# EAGLE board proto2fix (EAGLE 6.6.0), part 1 of 3
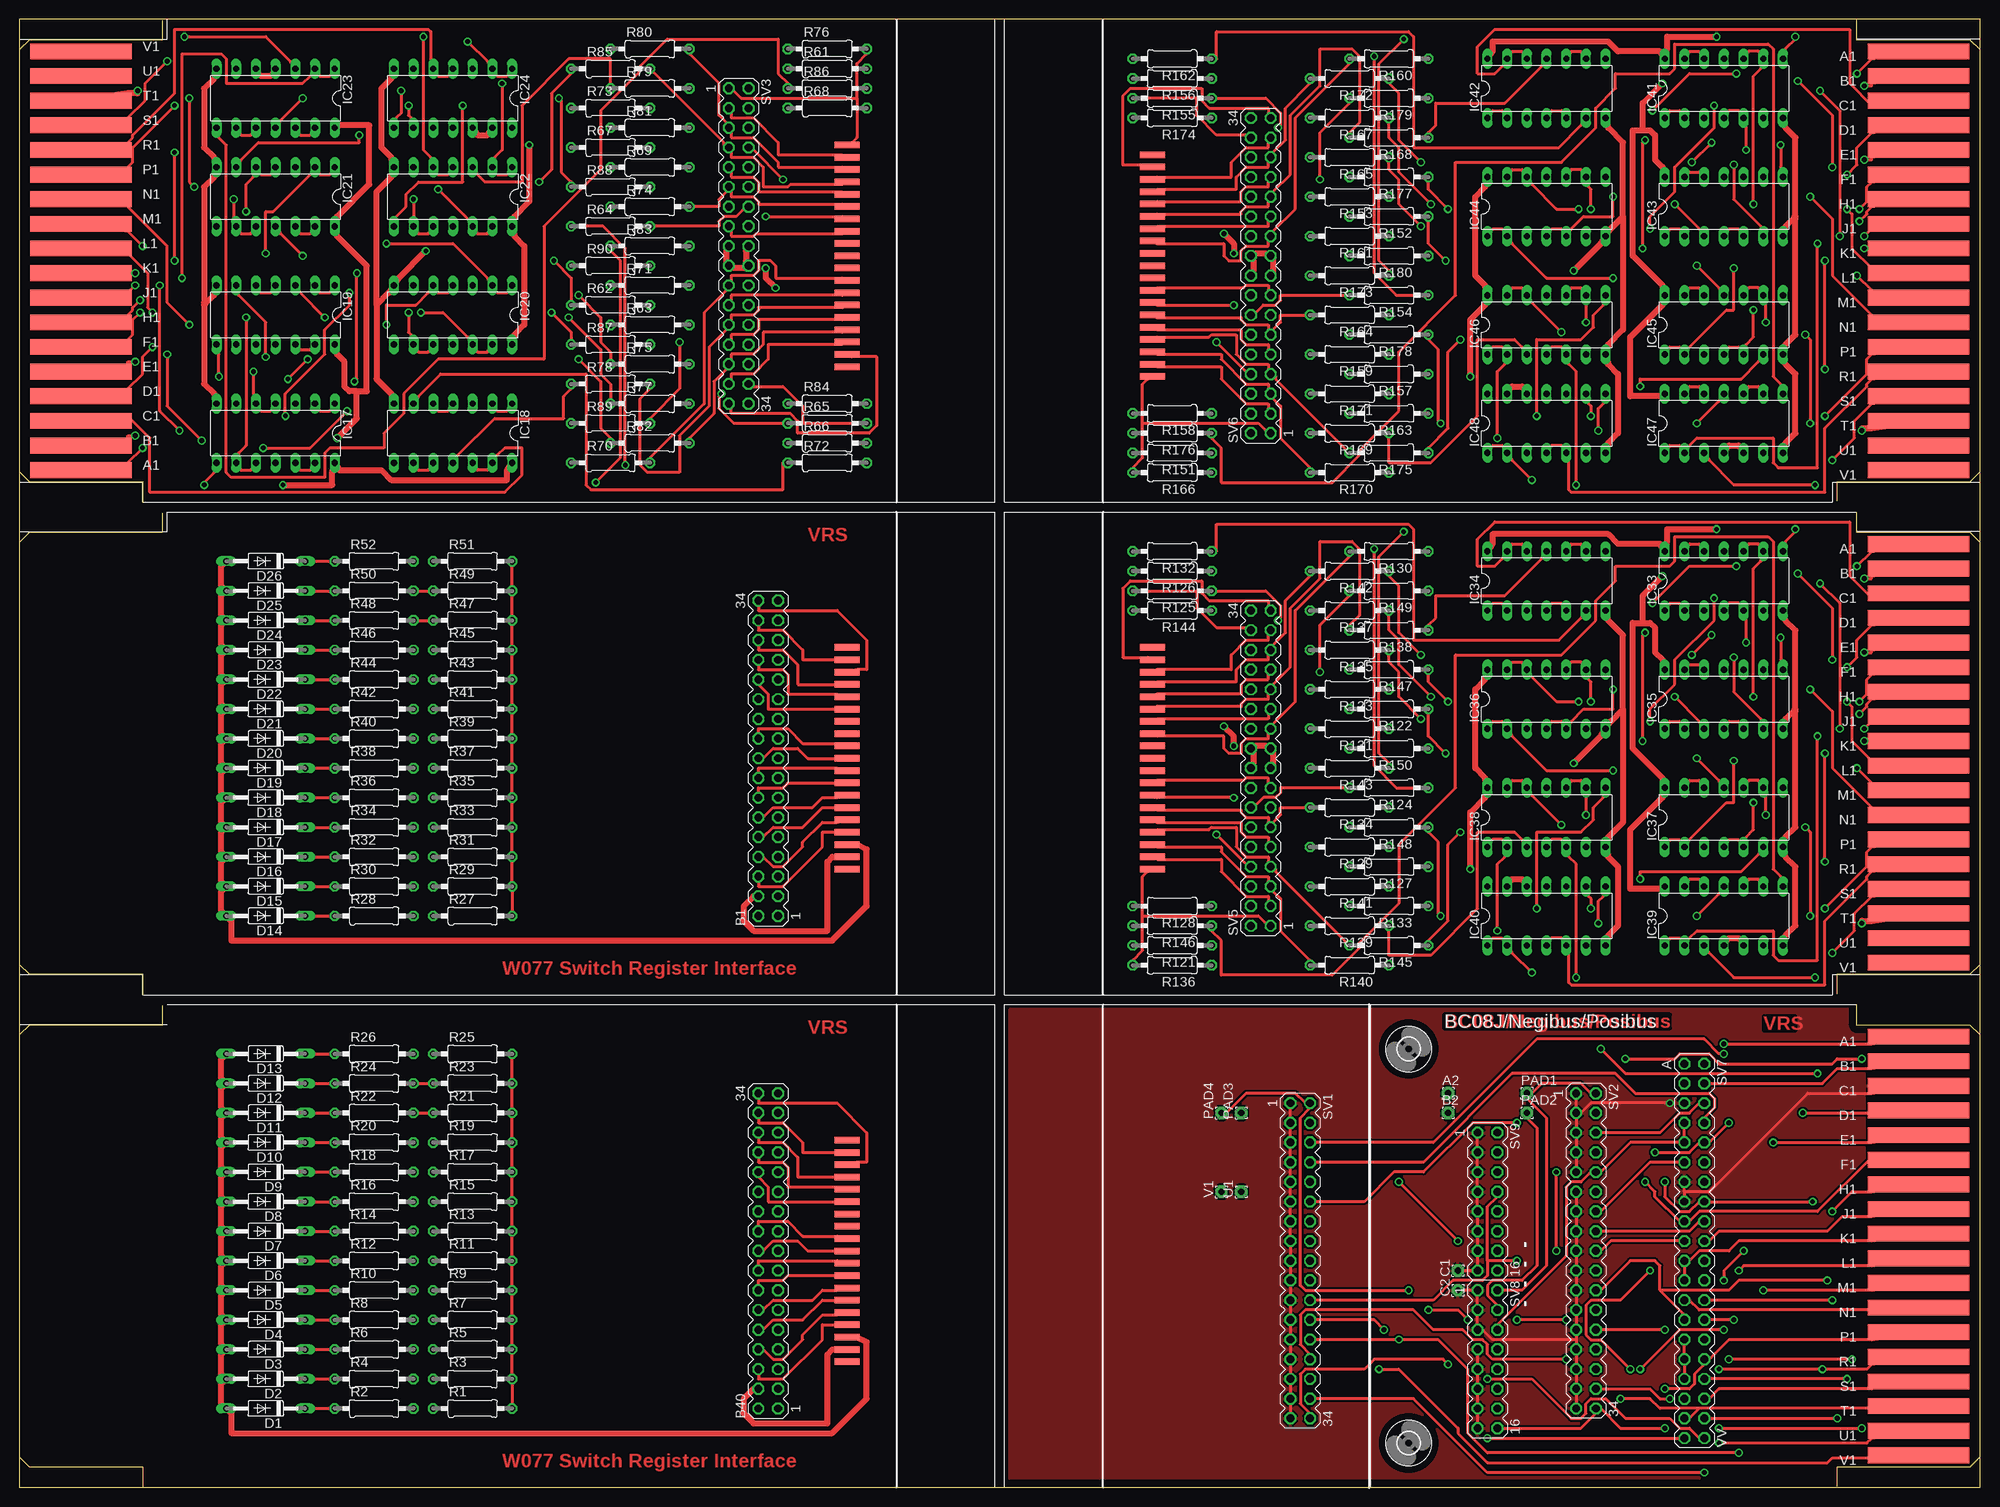
[diagram p0: board, top side]
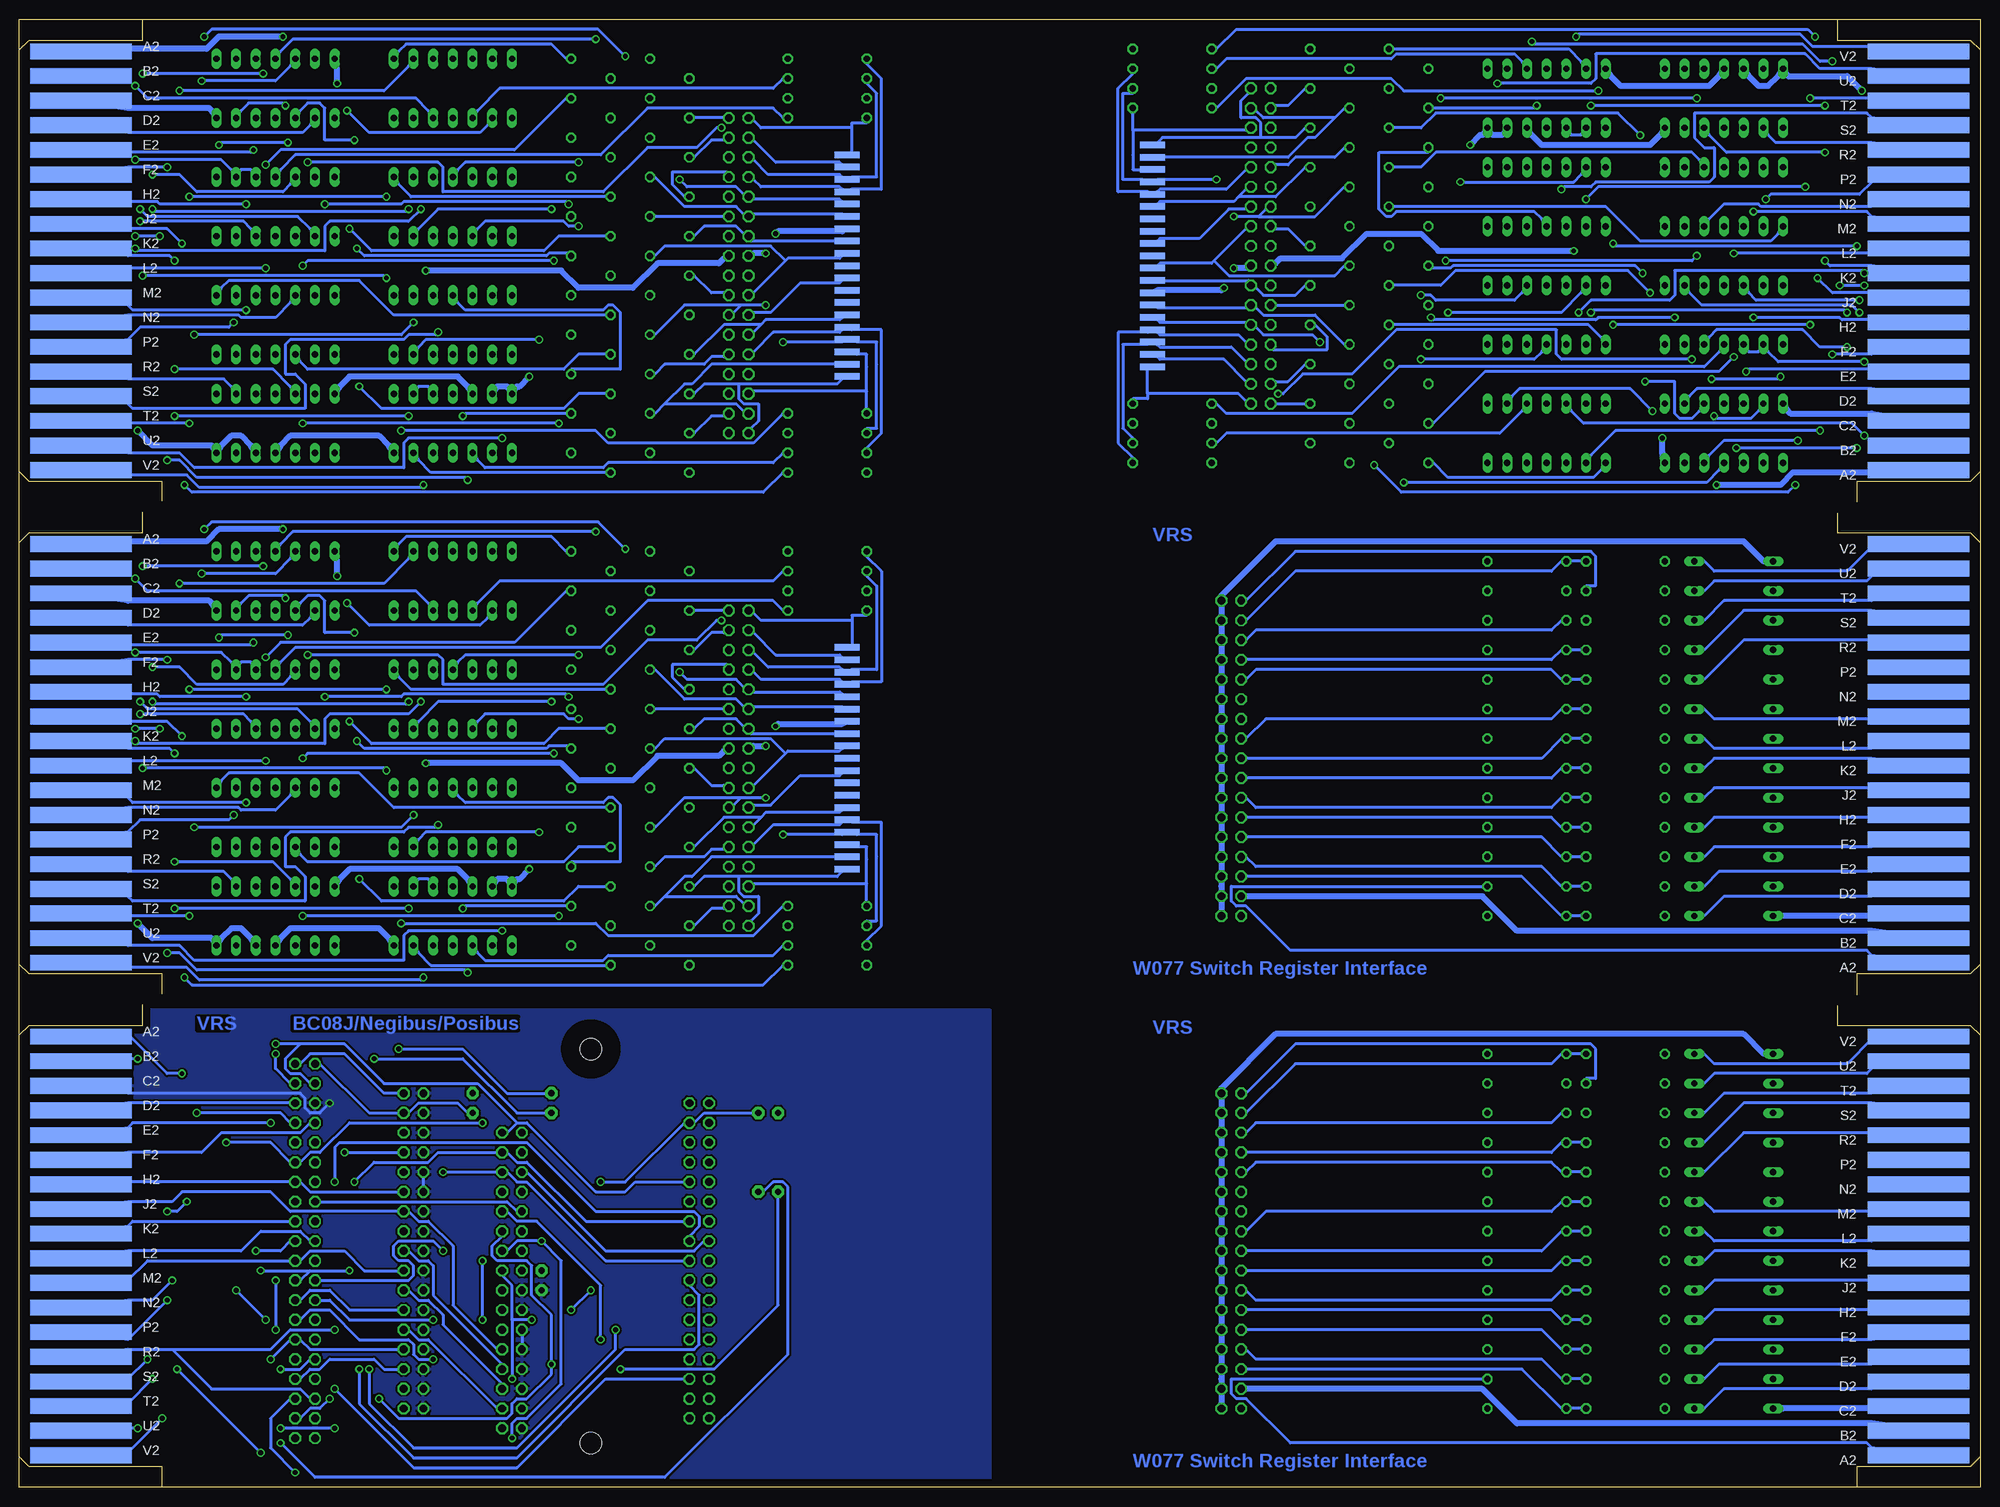
[diagram p1: board, bottom side, seen from below]

Size 252.73 x 189.23 mm. Coordinates in mm from the lower left corner, seen from the top.
Outline: 0,0 252.73,0 252.73,189.23 0,189.23 0,0
Copper layers (1*16): Top 0.035mm / dielectric 1.5mm / Bottom 0.035mm
Design rules "custompcb": minimum track width 10mil, minimum drill 24mil, track to track 8mil, track to pad 8mil, pad to pad 8mil, via to via 8mil, smd to smd 0mil, copper to edge 40mil, drill to drill 8mil, minimum pad ring 10mil, minimum via ring 8mil, stop-mask expansion 4mil, vias tented up to drill 0mil, thermal gap 10mil
Net classes: 0 default: width 0.381 mm; 1 supply: width 0.762 mm

## Footprints (pad centres in the part's own frame; a part is rotated, then mirrored left to right if it is on the bottom)
1,6/0,8 = drill 0.813 pad 1.6 octagon: 1 0,0
MA17-2 = drill 1.016 octagon: 1 -20.32,-1.27; 2 -20.32,1.27; 3 -17.78,-1.27; 4 -17.78,1.27; 5 -15.24,-1.27; 6 -15.24,1.27; 7 -12.7,-1.27; 8 -12.7,1.27; 9 -10.16,-1.27; 10 -10.16,1.27; 11 -7.62,-1.27; 12 -7.62,1.27; 13 -5.08,-1.27; 14 -5.08,1.27; 15 -2.54,-1.27; 16 -2.54,1.27; 17 0,-1.27; 18 0,1.27; 19 2.54,-1.27; 20 2.54,1.27; 21 5.08,-1.27; 22 5.08,1.27; 23 7.62,-1.27; 24 7.62,1.27; 25 10.16,-1.27; 26 10.16,1.27; 27 12.7,-1.27; 28 12.7,1.27; 29 15.24,-1.27; 30 15.24,1.27; 31 17.78,-1.27; 32 17.78,1.27; 33 20.32,-1.27; 34 20.32,1.27
FLEX19 = smd 3.175 x 0.838: 1 0,14.287; 2 0,12.7; 3 0,11.113; 4 0,9.525; 5 0,7.938; 6 0,6.35; 7 0,4.763; 8 0,3.175; 9 0,1.587; 10 0,0; 11 0,-1.587; 12 0,-3.175; 13 0,-4.763; 14 0,-6.35; 15 0,-7.938; 16 0,-9.525; 17 0,-11.113; 18 0,-12.7; 19 0,-14.287
DO35-10 = drill 0.813 long: A 5.08,0; C -5.08,0
EDGE-CON2 = smd 13.106 x 2.032: A1 7.938,4.128; B1 7.938,7.303; C1 7.938,10.477; D1 7.938,13.652; E1 7.938,16.828; F1 7.938,20.003; H1 7.938,23.177; J1 7.938,26.352; K1 7.938,29.527; L1 7.938,32.703; M1 7.938,35.877; N1 7.938,39.053; P1 7.938,42.227; R1 7.938,45.403; S1 7.938,48.578; T1 7.938,51.752; U1 7.938,54.928; V1 7.938,58.102 | smd 13.106 x 2.032 bottom: A2 7.938,4.128; B2 7.938,7.303; C2 7.938,10.477; D2 7.938,13.652; E2 7.938,16.828; F2 7.938,20.003; H2 7.938,23.177; J2 7.938,26.352; K2 7.938,29.527; L2 7.938,32.703; M2 7.938,35.877; N2 7.938,39.053; P2 7.938,42.227; R2 7.938,45.403; S2 7.938,48.578; T2 7.938,51.752; U2 7.938,54.928; V2 7.938,58.102
DIL14 = drill 0.813 long: 1 -7.62,-3.81; 2 -5.08,-3.81; 3 -2.54,-3.81; 4 0,-3.81; 5 2.54,-3.81; 6 5.08,-3.81; 7 7.62,-3.81; 8 7.62,3.81; 9 5.08,3.81; 10 2.54,3.81; 11 0,3.81; 12 -2.54,3.81; 13 -5.08,3.81; 14 -7.62,3.81
0207/10 = drill 0.813 octagon: 1 -5.08,0; 2 5.08,0
DEC40PINV = drill 1.016 octagon: A -24.13,-1.27; AA 3.81,-1.27; B -24.13,1.27; BB 3.81,1.27; C -21.59,-1.27; CC 6.35,-1.27; D -21.59,1.27; DD 6.35,1.27; E -19.05,-1.27; EE 8.89,-1.27; F -19.05,1.27; FF 8.89,1.27; H -16.51,-1.27; HH 11.43,-1.27; J -16.51,1.27; JJ 11.43,1.27; K -13.97,-1.27; KK 13.97,-1.27; L -13.97,1.27; LL 13.97,1.27; M -11.43,-1.27; MM 16.51,-1.27; N -11.43,1.27; NN 16.51,1.27; P -8.89,-1.27; PP 19.05,-1.27; R -8.89,1.27; RR 19.05,1.27; S -6.35,-1.27; SS 21.59,-1.27; T -6.35,1.27; TT 21.59,1.27; U -3.81,-1.27; UU 24.13,-1.27; V -3.81,1.27; VV 24.13,1.27; W -1.27,-1.27; X -1.27,1.27; Y 1.27,-1.27; Z 1.27,1.27
MA08-2 = drill 1.016 octagon: 1 -8.89,-1.27; 2 -8.89,1.27; 3 -6.35,-1.27; 4 -6.35,1.27; 5 -3.81,-1.27; 6 -3.81,1.27; 7 -1.27,-1.27; 8 -1.27,1.27; 9 1.27,-1.27; 10 1.27,1.27; 11 3.81,-1.27; 12 3.81,1.27; 13 6.35,-1.27; 14 6.35,1.27; 15 8.89,-1.27; 16 8.89,1.27
EDGE-CON1 = smd 13.106 x 2.032 bottom: A2 7.938,4.128; B2 7.938,7.303; C2 7.938,10.477; D2 7.938,13.652; E2 7.938,16.828; F2 7.938,20.003; H2 7.938,23.177; J2 7.938,26.352; K2 7.938,29.527; L2 7.938,32.703; M2 7.938,35.877; N2 7.938,39.053; P2 7.938,42.227; R2 7.938,45.403; S2 7.938,48.578; T2 7.938,51.752; U2 7.938,54.928; V2 7.938,58.102
2,8 = hole 2.8: 0,0

## Placement (x,y rotation side)
A2  [1,6/0,8]  184.15,50.8 0 top
B1  [MA17-2]  96.52,93.98 90 top
B2  [1,6/0,8]  184.15,48.26 0 top
B40  [MA17-2]  96.52,30.48 90 top
BOT2  FLEX19  [FLEX19]  106.68,158.75 0 bottom
BOT4  FLEX19  [FLEX19]  146.05,93.98 180 bottom
BOT5  FLEX19  [FLEX19]  146.05,157.48 180 bottom
C1  [1,6/0,8]  185.42,27.94 90 top
C2  [1,6/0,8]  185.42,25.4 90 top
D1  1N3606  [DO35-10]  31.75,10.16 180 top
D2  1N3606  [DO35-10]  31.75,13.97 180 top
D3  1N3606  [DO35-10]  31.75,17.78 180 top
D4  1N3606  [DO35-10]  31.75,21.59 180 top
D5  1N3606  [DO35-10]  31.75,25.4 180 top
D6  1N3606  [DO35-10]  31.75,29.21 180 top
D7  1N3606  [DO35-10]  31.75,33.02 180 top
D8  1N3606  [DO35-10]  31.75,36.83 180 top
D9  1N3606  [DO35-10]  31.75,40.64 180 top
D10  1N3606  [DO35-10]  31.75,44.45 180 top
D11  1N3606  [DO35-10]  31.75,48.26 180 top
D12  1N3606  [DO35-10]  31.75,52.07 180 top
D13  1N3606  [DO35-10]  31.75,55.88 180 top
D14  1N3606  [DO35-10]  31.75,73.66 180 top
D15  1N3606  [DO35-10]  31.75,77.47 180 top
D16  1N3606  [DO35-10]  31.75,81.28 180 top
D17  1N3606  [DO35-10]  31.75,85.09 180 top
D18  1N3606  [DO35-10]  31.75,88.9 180 top
D19  1N3606  [DO35-10]  31.75,92.71 180 top
D20  1N3606  [DO35-10]  31.75,96.52 180 top
D21  1N3606  [DO35-10]  31.75,100.33 180 top
D22  1N3606  [DO35-10]  31.75,104.14 180 top
D23  1N3606  [DO35-10]  31.75,107.95 180 top
D24  1N3606  [DO35-10]  31.75,111.76 180 top
D25  1N3606  [DO35-10]  31.75,115.57 180 top
D26  1N3606  [DO35-10]  31.75,119.38 180 top
EDGE2  [EDGE-CON2]  0,127 0 top
EDGE4  [EDGE-CON2]  252.73,125.73 180 top
EDGE5  [EDGE-CON2]  252.73,189.23 180 top
FLEX1  FLEX19  [FLEX19]  106.68,30.48 180 top
FLEX2  FLEX19  [FLEX19]  106.68,93.98 180 top
IC17  7400N  [DIL14]  33.02,135.89 180 top
IC18  7400N  [DIL14]  55.88,135.89 180 top
IC19  7400N  [DIL14]  33.02,151.13 180 top
IC20  7400N  [DIL14]  55.88,151.13 180 top
IC21  7400N  [DIL14]  33.02,166.37 180 top
IC22  7400N  [DIL14]  55.88,166.37 180 top
IC23  7400N  [DIL14]  33.02,179.07 180 top
IC24  7400N  [DIL14]  55.88,179.07 180 top
IC33  7400N  [DIL14]  219.71,116.84 0 top
IC34  7400N  [DIL14]  196.85,116.84 0 top
IC35  7400N  [DIL14]  219.71,101.6 0 top
IC36  7400N  [DIL14]  196.85,101.6 0 top
IC37  7400N  [DIL14]  219.71,86.36 0 top
IC38  7400N  [DIL14]  196.85,86.36 0 top
IC39  7400N  [DIL14]  219.71,73.66 0 top
IC40  7400N  [DIL14]  196.85,73.66 0 top
IC41  7400N  [DIL14]  219.71,180.34 0 top
IC42  7400N  [DIL14]  196.85,180.34 0 top
IC43  7400N  [DIL14]  219.71,165.1 0 top
IC44  7400N  [DIL14]  196.85,165.1 0 top
IC45  7400N  [DIL14]  219.71,149.86 0 top
IC46  7400N  [DIL14]  196.85,149.86 0 top
IC47  7400N  [DIL14]  219.71,137.16 0 top
IC48  7400N  [DIL14]  196.85,137.16 0 top
PAD1  [1,6/0,8]  194.31,50.8 0 top
PAD2  [1,6/0,8]  194.31,48.26 0 top
PAD3  [1,6/0,8]  157.48,48.26 90 top
PAD4  [1,6/0,8]  154.94,48.26 90 top
R1  1.5K  [0207/10]  58.42,10.16 0 top
R2  1.5K  [0207/10]  45.72,10.16 0 top
R3  1.5K  [0207/10]  58.42,13.97 0 top
R4  1.5K  [0207/10]  45.72,13.97 0 top
R5  1.5K  [0207/10]  58.42,17.78 0 top
R6  1.5K  [0207/10]  45.72,17.78 0 top
R7  1.5K  [0207/10]  58.42,21.59 0 top
R8  1.5K  [0207/10]  45.72,21.59 0 top
R9  1.5K  [0207/10]  58.42,25.4 0 top
R10  1.5K  [0207/10]  45.72,25.4 0 top
R11  1.5K  [0207/10]  58.42,29.21 0 top
R12  1.5K  [0207/10]  45.72,29.21 0 top
R13  1.5K  [0207/10]  58.42,33.02 0 top
R14  1.5K  [0207/10]  45.72,33.02 0 top
R15  1.5K  [0207/10]  58.42,36.83 0 top
R16  1.5K  [0207/10]  45.72,36.83 0 top
R17  1.5K  [0207/10]  58.42,40.64 0 top
R18  1.5K  [0207/10]  45.72,40.64 0 top
R19  1.5K  [0207/10]  58.42,44.45 0 top
R20  1.5K  [0207/10]  45.72,44.45 0 top
R21  1.5K  [0207/10]  58.42,48.26 0 top
R22  1.5K  [0207/10]  45.72,48.26 0 top
R23  1.5K  [0207/10]  58.42,52.07 0 top
R24  1.5K  [0207/10]  45.72,52.07 0 top
R25  1.5K  [0207/10]  58.42,55.88 0 top
R26  1.5K  [0207/10]  45.72,55.88 0 top
R27  1.5K  [0207/10]  58.42,73.66 0 top
R28  1.5K  [0207/10]  45.72,73.66 0 top
R29  1.5K  [0207/10]  58.42,77.47 0 top
R30  1.5K  [0207/10]  45.72,77.47 0 top
R31  1.5K  [0207/10]  58.42,81.28 0 top
R32  1.5K  [0207/10]  45.72,81.28 0 top
R33  1.5K  [0207/10]  58.42,85.09 0 top
R34  1.5K  [0207/10]  45.72,85.09 0 top
R35  1.5K  [0207/10]  58.42,88.9 0 top
R36  1.5K  [0207/10]  45.72,88.9 0 top
R37  1.5K  [0207/10]  58.42,92.71 0 top
R38  1.5K  [0207/10]  45.72,92.71 0 top
R39  1.5K  [0207/10]  58.42,96.52 0 top
R40  1.5K  [0207/10]  45.72,96.52 0 top
R41  1.5K  [0207/10]  58.42,100.33 0 top
R42  1.5K  [0207/10]  45.72,100.33 0 top
R43  1.5K  [0207/10]  58.42,104.14 0 top
R44  1.5K  [0207/10]  45.72,104.14 0 top
R45  1.5K  [0207/10]  58.42,107.95 0 top
R46  1.5K  [0207/10]  45.72,107.95 0 top
R47  1.5K  [0207/10]  58.42,111.76 0 top
R48  1.5K  [0207/10]  45.72,111.76 0 top
R49  1.5K  [0207/10]  58.42,115.57 0 top
R50  1.5K  [0207/10]  45.72,115.57 0 top
R51  1.5K  [0207/10]  58.42,119.38 0 top
R52  1.5K  [0207/10]  45.72,119.38 0 top
R61  470  [0207/10]  104.14,182.88 0 top
R62  470  [0207/10]  76.2,152.4 0 top
R63  470  [0207/10]  81.28,149.86 0 top
R64  470  [0207/10]  76.2,162.56 0 top
R65  470  [0207/10]  104.14,137.16 0 top
R66  470  [0207/10]  104.14,134.62 0 top
R67  470  [0207/10]  76.2,172.72 0 top
R68  470  [0207/10]  104.14,177.8 0 top
R69  470  [0207/10]  81.28,170.18 0 top
R70  470  [0207/10]  76.2,132.08 0 top
R71  470  [0207/10]  81.28,154.94 0 top
R72  470  [0207/10]  104.14,132.08 0 top
R73  470  [0207/10]  76.2,177.8 0 top
R74  470  [0207/10]  81.28,165.1 0 top
R75  470  [0207/10]  81.28,144.78 0 top
R76  470  [0207/10]  104.14,185.42 0 top
R77  470  [0207/10]  81.28,139.7 0 top
R78  470  [0207/10]  76.2,142.24 0 top
R79  470  [0207/10]  81.28,180.34 0 top
R80  470  [0207/10]  81.28,185.42 0 top
R81  470  [0207/10]  81.28,175.26 0 top
R82  470  [0207/10]  81.28,134.62 0 top
R83  470  [0207/10]  81.28,160.02 0 top
R84  470  [0207/10]  104.14,139.7 0 top
R85  470  [0207/10]  76.2,182.88 0 top
R86  470  [0207/10]  104.14,180.34 0 top
R87  470  [0207/10]  76.2,147.32 0 top
R88  470  [0207/10]  76.2,167.64 0 top
R89  470  [0207/10]  76.2,137.16 0 top
R90  470  [0207/10]  76.2,157.48 0 top
R121  470  [0207/10]  148.59,69.85 180 top
R122  470  [0207/10]  176.53,100.33 180 top
R123  470  [0207/10]  171.45,102.87 180 top
R124  470  [0207/10]  176.53,90.17 180 top
R125  470  [0207/10]  148.59,115.57 180 top
R126  470  [0207/10]  148.59,118.11 180 top
R127  470  [0207/10]  176.53,80.01 180 top
R128  470  [0207/10]  148.59,74.93 180 top
R129  470  [0207/10]  171.45,82.55 180 top
R130  470  [0207/10]  176.53,120.65 180 top
R131  470  [0207/10]  171.45,97.79 180 top
R132  470  [0207/10]  148.59,120.65 180 top
R133  470  [0207/10]  176.53,74.93 180 top
R134  470  [0207/10]  171.45,87.63 180 top
R135  470  [0207/10]  171.45,107.95 180 top
R136  470  [0207/10]  148.59,67.31 180 top
R137  470  [0207/10]  171.45,113.03 180 top
R138  470  [0207/10]  176.53,110.49 180 top
R139  470  [0207/10]  171.45,72.39 180 top
R140  470  [0207/10]  171.45,67.31 180 top
R141  470  [0207/10]  171.45,77.47 180 top
R142  470  [0207/10]  171.45,118.11 180 top
R143  470  [0207/10]  171.45,92.71 180 top
R144  470  [0207/10]  148.59,113.03 180 top
R145  470  [0207/10]  176.53,69.85 180 top
R146  470  [0207/10]  148.59,72.39 180 top
R147  470  [0207/10]  176.53,105.41 180 top
R148  470  [0207/10]  176.53,85.09 180 top
R149  470  [0207/10]  176.53,115.57 180 top
R150  470  [0207/10]  176.53,95.25 180 top
R151  470  [0207/10]  148.59,133.35 180 top
R152  470  [0207/10]  176.53,163.83 180 top
R153  470  [0207/10]  171.45,166.37 180 top
R154  470  [0207/10]  176.53,153.67 180 top
R155  470  [0207/10]  148.59,179.07 180 top
R156  470  [0207/10]  148.59,181.61 180 top
R157  470  [0207/10]  176.53,143.51 180 top
R158  470  [0207/10]  148.59,138.43 180 top
R159  470  [0207/10]  171.45,146.05 180 top
R160  470  [0207/10]  176.53,184.15 180 top
R161  470  [0207/10]  171.45,161.29 180 top
R162  470  [0207/10]  148.59,184.15 180 top
R163  470  [0207/10]  176.53,138.43 180 top
R164  470  [0207/10]  171.45,151.13 180 top
R165  470  [0207/10]  171.45,171.45 180 top
R166  470  [0207/10]  148.59,130.81 180 top
R167  470  [0207/10]  171.45,176.53 180 top
R168  470  [0207/10]  176.53,173.99 180 top
R169  470  [0207/10]  171.45,135.89 180 top
R170  470  [0207/10]  171.45,130.81 180 top
R171  470  [0207/10]  171.45,140.97 180 top
R172  470  [0207/10]  171.45,181.61 180 top
R173  470  [0207/10]  171.45,156.21 180 top
R174  470  [0207/10]  148.59,176.53 180 top
R175  470  [0207/10]  176.53,133.35 180 top
R176  470  [0207/10]  148.59,135.89 180 top
R177  470  [0207/10]  176.53,168.91 180 top
R178  470  [0207/10]  176.53,148.59 180 top
R179  470  [0207/10]  176.53,179.07 180 top
R180  470  [0207/10]  176.53,158.75 180 top
SV1  [MA17-2]  165.1,29.21 270 top
SV2  [MA17-2]  201.93,30.48 270 top
SV3  [MA17-2]  92.71,160.02 270 top
SV5  [MA17-2]  160.02,92.71 90 top
SV6  [MA17-2]  160.02,156.21 90 top
SV7  [DEC40PINV]  215.9,30.48 270 top
SV8  [MA08-2]  189.23,16.51 270 top
SV9  [MA08-2]  189.23,36.83 270 top
TOP2  FLEX19  [FLEX19]  106.68,158.75 0 top
TOP4  FLEX19  [FLEX19]  146.05,93.98 180 top
TOP5  FLEX19  [FLEX19]  146.05,157.48 180 top
U1  [1,6/0,8]  157.48,38.1 90 top
U$2  EDGE-1  [EDGE-CON1]  0,0 0 top
U$8  EDGE-1  [EDGE-CON1]  0,63.5 0 top
U$9  [EDGE-CON2]  252.73,62.23 180 top
U$11  [2,8]  179.07,56.52 0 top
U$12  [2,8]  179.07,5.71 0 top
V1  [1,6/0,8]  154.94,38.1 90 top

## Library data of the parts
A2 B2 C1 C2 PAD1-PAD4 U1 V1 = wirepad
B1 B40 SV1-SV3 SV5 SV6 SV8 SV9 = con-lstb
BOT2 BOT4 BOT5 EDGE2 EDGE4 EDGE5 FLEX1 FLEX2 SV7 TOP2 TOP4 TOP5 U$2 U$8 U$9 = dec-con
D1-D26 = diode
IC17-IC24 IC33-IC48 = 74xx-us
R1-R52 R61-R90 R121-R180 = rcl
U$11 U$12 = holes

## Nets
-15V [supply]: B40.4 FLEX1.2 U$2.B2
-15V1 [supply]: B1.4 FLEX2.2 U$8.B2
-15V2: B2.1 U$9.B2
A1: SV1.10 SV7.C SV9.2 U$9.A1
B1: SV1.6 SV7.D U$9.B1
BOT31: BOT2.15 R89.2 SV3.26
BOT32: BOT2.3 R68.2 SV3.6
BOT33: BOT2.1 R81.2 SV3.2
BOT34: BOT2.2 R73.2 SV3.4
BOT35: BOT2.4 R86.2 SV3.8
BOT36: BOT2.5 R61.2 SV3.10
BOT37: BOT2.19 R84.2 SV3.34
BOT38: BOT2.18 R65.2 SV3.32
BOT39: BOT2.17 R66.2 SV3.30
BOT40: BOT2.16 R72.2 SV3.28
BOT41: BOT2.14 R87.2 SV3.24
BOT42: BOT2.12 R71.2 SV3.22
BOT43: BOT2.11 R90.2 SV3.16
BOT44: BOT2.9 R64.2 SV3.14
BOT45: BOT2.6 R69.2 SV3.12
BOT61: BOT4.15 R149.2 SV5.26
BOT62: BOT4.3 R128.2 SV5.6
BOT63: BOT4.1 R141.2 SV5.2
BOT64: BOT4.2 R133.2 SV5.4
BOT65: BOT4.4 R146.2 SV5.8
BOT66: BOT4.5 R121.2 SV5.10
BOT67: BOT4.19 R144.2 SV5.34
BOT68: BOT4.18 R125.2 SV5.32
BOT69: BOT4.17 R126.2 SV5.30
BOT70: BOT4.16 R132.2 SV5.28
BOT71: BOT4.14 R147.2 SV5.24
BOT72: BOT4.12 R131.2 SV5.22
BOT73: BOT4.11 R150.2 SV5.16
BOT74: BOT4.9 R124.2 SV5.14
BOT75: BOT4.6 R129.2 SV5.12
BOT76: BOT5.15 R179.2 SV6.26
BOT77: BOT5.3 R158.2 SV6.6
BOT78: BOT5.1 R171.2 SV6.2
BOT79: BOT5.2 R163.2 SV6.4
BOT80: BOT5.4 R176.2 SV6.8
BOT81: BOT5.5 R151.2 SV6.10
BOT82: BOT5.19 R174.2 SV6.34
BOT83: BOT5.18 R155.2 SV6.32
BOT84: BOT5.17 R156.2 SV6.30
BOT85: BOT5.16 R162.2 SV6.28
BOT86: BOT5.14 R177.2 SV6.24
BOT87: BOT5.12 R161.2 SV6.22
BOT88: BOT5.11 R180.2 SV6.16
BOT89: BOT5.9 R154.2 SV6.14
BOT90: BOT5.6 R159.2 SV6.12
C1: C1.1 SV1.1 SV1.3 SV1.5 SV1.7 SV1.9 SV1.11 SV1.13 SV1.15 SV1.17 SV1.19 SV1.21 SV1.23 SV1.25 SV1.27 SV1.29 SV1.31 SV1.33 SV7.P SV7.S SV9.1 SV9.3 SV9.5 SV9.7 SV9.9 SV9.11 SV9.13 SV9.15 U$9.C1
C2: C2.1 SV2.1 SV2.3 SV2.5 SV2.7 SV2.9 SV2.11 SV2.13 SV2.15 SV2.17 SV2.19 SV2.21 SV2.23 SV2.25 SV2.27 SV2.29 SV2.31 SV2.33 SV7.E SV8.1 SV8.3 SV8.5 SV8.7 SV8.9 SV8.11 SV8.13 SV8.15 U$9.C2
D1: D14.C R28.1 U$8.D2
D2: D1.C R2.1 U$2.D2
D3: SV2.6 SV7.F U$9.D2
D4: SV1.8 SV7.J U$9.D1
E1: D15.C R30.1 U$8.E2
E2: D2.C R4.1 U$2.E2
E3: SV2.8 SV7.L U$9.E2
E4: SV1.12 SV7.N U$9.E1
F1: D16.C R32.1 U$8.F2
F2: D3.C R6.1 U$2.F2
F3: SV2.10 SV7.H SV7.K SV8.6 U$9.F2
F4: SV1.14 SV7.U SV9.4 U$9.F1
GND [supply]: B40.1 B40.3 B40.5 B40.7 B40.9 B40.11 B40.13 B40.15 B40.17 B40.19 B40.21 B40.23 B40.25 B40.27 B40.29 B40.31 B40.33 D1.A D2.A D3.A D4.A D5.A D6.A D7.A D8.A D9.A D10.A D11.A D12.A D13.A FLEX1.3 U$2.C2
GND1 [supply]: B1.1 B1.3 B1.5 B1.7 B1.9 B1.11 B1.13 B1.15 B1.17 B1.19 B1.21 B1.23 B1.25 B1.27 B1.29 B1.31 B1.33 D14.A D15.A D16.A D17.A D18.A D19.A D20.A D21.A D22.A D23.A D24.A D25.A D26.A FLEX2.3 U$8.C2
GND2 [supply]: BOT2.13 EDGE2.C2 EDGE2.T1 IC17.7 IC18.7 IC19.7 IC20.7 IC21.7 IC22.7 IC23.4 IC23.5 IC23.7 IC24.7 SV3.17 SV3.18 SV3.19 SV3.20
GND4 [supply]: BOT4.13 EDGE4.C2 EDGE4.T1 IC33.7 IC34.7 IC35.7 IC36.7 IC37.7 IC38.7 IC39.4 IC39.5 IC39.7 IC40.7 SV5.17 SV5.18 SV5.19 SV5.20
GND5 [supply]: BOT5.13 EDGE5.C2 EDGE5.T1 IC41.7 IC42.7 IC43.7 IC44.7 IC45.7 IC46.7 IC47.4 IC47.5 IC47.7 IC48.7 SV6.17 SV6.18 SV6.19 SV6.20
H1: D17.C R34.1 U$8.H2
H2: D4.C R8.1 U$2.H2
H3: SV2.12 SV7.R U$9.H2
H4: SV1.16 SV7.T U$9.H1
J1: D18.C R36.1 U$8.J2
J2: D5.C R10.1 U$2.J2
J3: SV1.20 SV7.X U$9.J1
J4: SV2.14 SV7.M SV8.8 U$9.J2
JA2: PAD1.1 SV2.2 SV7.B SV8.2
JB2: PAD2.1 SV2.4 SV7.A SV8.4
JU1: PAD3.1 SV1.4 SV7.UU SV9.14
JV1: PAD4.1 SV1.2 SV7.VV SV9.16
K1: D19.C R38.1 U$8.K2
K2: D6.C R12.1 U$2.K2
K3: SV2.16 SV7.V U$9.K2
K4: SV1.18 SV7.AA SV7.Y SV9.6 U$9.K1
L1: D20.C R40.1 U$8.L2
L2: D7.C R14.1 U$2.L2
L3: SV1.24 SV7.BB U$9.L1
L4: SV2.18 SV7.W SV8.10 U$9.L2
M1: D21.C R42.1 U$8.M2
M2: D8.C R16.1 U$2.M2
M3: SV2.20 SV7.Z U$9.M2
M4: SV1.28 SV7.FF U$9.M1
N1: SV1.22 SV7.CC SV9.8 U$9.N1
N2: SV2.22 SV7.EE SV8.12 U$9.N2
N$121: EDGE2.A1 IC18.1 IC18.2
N$122: IC18.3 R66.1
N$123: IC19.8 R65.1
N$124: IC17.8 R64.1
N$125: IC20.8 R63.1
N$126: IC21.11 R62.1
N$127: EDGE2.H2 IC17.9 IC17.10
N$128: EDGE2.S1 IC24.1 IC24.2
N$129: EDGE2.N2 IC21.12 IC21.13
N$130: EDGE2.L1 IC20.9 IC20.10
N$131: EDGE2.E1 IC19.9 IC19.10
N$132: EDGE2.P1 IC24.9 IC24.10
N$133: EDGE2.B1 IC18.4 IC18.5
N$134: EDGE2.E2 IC17.4 IC17.5
N$135: EDGE2.J1 IC18.9 IC18.10
N$136: EDGE2.L2 IC21.1 IC21.2
N$137: EDGE2.S2 IC22.12 IC22.13
N$138: IC24.8 R68.1
N$139: IC21.3 R69.1
N$140: IC18.8 R70.1
N$141: IC17.6 R71.1
N$142: IC18.6 R72.1
N$143: IC22.11 R67.1
N$144: IC24.3 R61.1
N$145: EDGE2.P2 IC21.9 IC21.10
N$146: EDGE2.C1 IC18.12 IC18.13
N$147: EDGE2.F1 IC19.1 IC19.2
N$148: EDGE2.J2 IC23.1 IC23.2
N$149: EDGE2.M1 IC20.1 IC20.2
N$150: EDGE2.T2 IC22.9 IC22.10
N$151: IC22.8 R73.1
N$152: IC21.8 R74.1
N$153: IC20.3 R75.1
N$154: IC23.3 R76.1
N$155: IC18.11 R78.1
N$156: IC19.3 R77.1
N$157: IC22.3 R79.1
N$158: IC24.6 R80.1
N$159: IC21.6 R81.1
N$160: IC20.11 R82.1
N$161: IC17.11 R83.1
N$162: IC19.11 R84.1
N$163: EDGE2.R1 IC24.4 IC24.5
N$164: EDGE2.F2 IC17.12 IC17.13
N$165: EDGE2.K1 IC20.12 IC20.13
N$166: EDGE2.M2 IC21.4 IC21.5
N$167: EDGE2.U2 IC22.1 IC22.2
N$168: EDGE2.R2 IC23.9 IC23.10
N$169: EDGE2.D1 IC19.12 IC19.13
N$170: EDGE2.D2 IC17.1 IC17.2
N$171: EDGE2.H1 IC19.4 IC19.5
N$172: EDGE2.K2 IC23.12 IC23.13
N$173: EDGE2.N1 IC20.4 IC20.5
N$174: EDGE2.V2 IC22.4 IC22.5
N$175: IC22.6 R85.1
N$176: IC23.8 R86.1
N$177: IC20.6 R87.1
N$178: IC23.11 R88.1
N$179: IC19.6 R89.1
N$180: IC17.3 R90.1
N$241: EDGE4.A1 IC34.1 IC34.2
N$242: IC34.3 R126.1
N$243: IC35.8 R125.1
N$244: IC33.8 R124.1
N$245: IC36.8 R123.1
N$246: IC37.11 R122.1
N$247: EDGE4.H2 IC33.9 IC33.10
N$248: EDGE4.S1 IC40.1 IC40.2
N$249: EDGE4.N2 IC37.12 IC37.13
N$250: EDGE4.L1 IC36.9 IC36.10
N$251: EDGE4.E1 IC35.9 IC35.10
N$252: EDGE4.P1 IC40.9 IC40.10
N$253: EDGE4.B1 IC34.4 IC34.5
N$254: EDGE4.E2 IC33.4 IC33.5
N$255: EDGE4.J1 IC34.9 IC34.10
N$256: EDGE4.L2 IC37.1 IC37.2
N$257: EDGE4.S2 IC38.12 IC38.13
N$258: IC40.8 R128.1
N$259: IC37.3 R129.1
N$260: IC34.8 R130.1
N$261: IC33.6 R131.1
N$262: IC34.6 R132.1
N$263: IC38.11 R127.1
N$264: IC40.3 R121.1
N$265: EDGE4.P2 IC37.9 IC37.10
N$266: EDGE4.C1 IC34.12 IC34.13
N$267: EDGE4.F1 IC35.1 IC35.2
N$268: EDGE4.J2 IC39.1 IC39.2
N$269: EDGE4.M1 IC36.1 IC36.2
N$270: EDGE4.T2 IC38.9 IC38.10
N$271: IC38.8 R133.1
N$272: IC37.8 R134.1
N$273: IC36.3 R135.1
N$274: IC39.3 R136.1
N$275: IC34.11 R138.1
N$276: IC35.3 R137.1
N$277: IC38.3 R139.1
N$278: IC40.6 R140.1
N$279: IC37.6 R141.1
N$280: IC36.11 R142.1
N$281: IC33.11 R143.1
N$282: IC35.11 R144.1
N$283: EDGE4.R1 IC40.4 IC40.5
N$284: EDGE4.F2 IC33.12 IC33.13
N$285: EDGE4.K1 IC36.12 IC36.13
N$286: EDGE4.M2 IC37.4 IC37.5
N$287: EDGE4.U2 IC38.1 IC38.2
N$288: EDGE4.R2 IC39.9 IC39.10
N$289: EDGE4.D1 IC35.12 IC35.13
N$290: EDGE4.D2 IC33.1 IC33.2
N$291: EDGE4.H1 IC35.4 IC35.5
N$292: EDGE4.K2 IC39.12 IC39.13
N$293: EDGE4.N1 IC36.4 IC36.5
N$294: EDGE4.V2 IC38.4 IC38.5
N$295: IC38.6 R145.1
N$296: IC39.8 R146.1
N$297: IC36.6 R147.1
N$298: IC39.11 R148.1
N$299: IC35.6 R149.1
N$300: IC33.3 R150.1
N$301: EDGE5.A1 IC42.1 IC42.2
N$302: IC42.3 R156.1
N$303: IC43.8 R155.1
N$304: IC41.8 R154.1
N$305: IC44.8 R153.1
N$306: IC45.11 R152.1
N$307: EDGE5.H2 IC41.9 IC41.10
N$308: EDGE5.S1 IC48.1 IC48.2
N$309: EDGE5.N2 IC45.12 IC45.13
N$310: EDGE5.L1 IC44.9 IC44.10
N$311: EDGE5.E1 IC43.9 IC43.10
N$312: EDGE5.P1 IC48.9 IC48.10
N$313: EDGE5.B1 IC42.4 IC42.5
N$314: EDGE5.E2 IC41.4 IC41.5
N$315: EDGE5.J1 IC42.9 IC42.10
N$316: EDGE5.L2 IC45.1 IC45.2
N$317: EDGE5.S2 IC46.12 IC46.13
N$318: IC48.8 R158.1
N$319: IC45.3 R159.1
N$320: IC42.8 R160.1
N$321: IC41.6 R161.1
N$322: IC42.6 R162.1
N$323: IC46.11 R157.1
N$324: IC48.3 R151.1
N$325: EDGE5.P2 IC45.9 IC45.10
N$326: EDGE5.C1 IC42.12 IC42.13
N$327: EDGE5.F1 IC43.1 IC43.2
N$328: EDGE5.J2 IC47.1 IC47.2
N$329: EDGE5.M1 IC44.1 IC44.2
N$330: EDGE5.T2 IC46.9 IC46.10
N$331: IC46.8 R163.1
N$332: IC45.8 R164.1
N$333: IC44.3 R165.1
N$334: IC47.3 R166.1
N$335: IC42.11 R168.1
N$336: IC43.3 R167.1
N$337: IC46.3 R169.1
N$338: IC48.6 R170.1
N$339: IC45.6 R171.1
N$340: IC44.11 R172.1
N$341: IC41.11 R173.1
N$342: IC43.11 R174.1
N$343: EDGE5.R1 IC48.4 IC48.5
N$344: EDGE5.F2 IC41.12 IC41.13
N$345: EDGE5.K1 IC44.12 IC44.13
N$346: EDGE5.M2 IC45.4 IC45.5
N$347: EDGE5.U2 IC46.1 IC46.2
N$348: EDGE5.R2 IC47.9 IC47.10
N$349: EDGE5.D1 IC43.12 IC43.13
N$350: EDGE5.D2 IC41.1 IC41.2
N$351: EDGE5.H1 IC43.4 IC43.5
N$352: EDGE5.K2 IC47.12 IC47.13
N$353: EDGE5.N1 IC44.4 IC44.5
N$354: EDGE5.V2 IC46.4 IC46.5
N$355: IC46.6 R175.1
N$356: IC47.8 R176.1
N$357: IC44.6 R177.1
N$358: IC47.11 R178.1
N$359: IC43.6 R179.1
N$360: IC41.3 R180.1
P1: SV1.30 SV7.LL U$9.P1
P2: SV2.24 SV7.DD U$9.P2
R1: D22.C R44.1 U$8.R2
R2: D9.C R18.1 U$2.R2
R3: SV2.26 SV7.PP SV8.14 U$9.R2
R4: SV1.26 SV7.HH SV7.KK SV7.MM SV9.10 U$9.R1
S1: D23.C R46.1 U$8.S2
S2: D10.C R20.1 U$2.S2
S3: SV2.28 SV7.JJ U$9.S2
S4: SV1.32 SV7.RR U$9.S1
SD1: B1.6 FLEX2.4 R27.1 R28.2
SD2: B40.6 FLEX1.4 R1.1 R2.2
SE1: B1.8 FLEX2.5 R29.1 R30.2
SE2: B40.8 FLEX1.5 R3.1 R4.2
SF1: B1.10 FLEX2.6 R31.1 R32.2
SF2: B40.10 FLEX1.6 R5.1 R6.2
SH1: B1.12 FLEX2.7 R33.1 R34.2
SH2: B40.12 FLEX1.7 R7.1 R8.2
SJ1: B1.14 FLEX2.8 R35.1 R36.2
SJ2: B40.14 FLEX1.8 R9.1 R10.2
SK1: B1.16 FLEX2.9 R37.1 R38.2
SK2: B40.16 FLEX1.9 R11.1 R12.2
SL1: B1.18 FLEX2.10 R39.1 R40.2
SL2: B40.18 FLEX1.10 R13.1 R14.2
SM1: B1.20 FLEX2.11 R41.1 R42.2
SM2: B40.20 FLEX1.11 R15.1 R16.2
SR1: B1.26 FLEX2.14 R43.1 R44.2
SR2: B40.26 FLEX1.14 R17.1 R18.2
SS1: B1.28 FLEX2.15 R45.1 R46.2
SS2: B40.28 FLEX1.15 R19.1 R20.2
ST1: B1.30 FLEX2.16 R47.1 R48.2
ST2: B40.30 FLEX1.16 R21.1 R22.2
SU1: B1.34 FLEX2.17 R49.1 R50.2
SU2: B40.34 FLEX1.17 R23.1 R24.2
SV1: B1.32 FLEX2.18 R51.1 R52.2
SV2: B40.32 FLEX1.18 R25.1 R26.2
T1: D24.C R48.1 U$8.T2
T2: D11.C R22.1 U$2.T2
T3: SV2.30 SV7.NN U$9.T2
T4: SV1.34 SV7.SS SV9.12 U$9.T1
TOP31: R77.2 SV3.33 TOP2.18
TOP32: R75.2 SV3.31 TOP2.17
TOP33: R82.2 SV3.29 TOP2.16
TOP34: R63.2 SV3.27 TOP2.15
TOP35: R78.2 SV3.25 TOP2.14
TOP36: R62.2 SV3.23 TOP2.13
TOP37: R83.2 SV3.15 TOP2.8
TOP38: R88.2 SV3.13 TOP2.7
TOP39: R74.2 SV3.11 TOP2.6
TOP40: R67.2 SV3.9 TOP2.5
TOP41: R85.2 SV3.7 TOP2.4
TOP42: R76.2 SV3.1 TOP2.1
TOP43: R70.2 SV3.21 TOP2.12
TOP44: R79.2 SV3.3 TOP2.2
TOP45: R80.2 SV3.5 TOP2.3
TOP61: R137.2 SV5.33 TOP4.18
TOP62: R135.2 SV5.31 TOP4.17
TOP63: R142.2 SV5.29 TOP4.16
TOP64: R123.2 SV5.27 TOP4.15
TOP65: R138.2 SV5.25 TOP4.14
TOP66: R122.2 SV5.23 TOP4.13
TOP67: R143.2 SV5.15 TOP4.8
TOP68: R148.2 SV5.13 TOP4.7
TOP69: R134.2 SV5.11 TOP4.6
TOP70: R127.2 SV5.9 TOP4.5
TOP71: R145.2 SV5.7 TOP4.4
TOP72: R136.2 SV5.1 TOP4.1
TOP73: R130.2 SV5.21 TOP4.12
TOP74: R139.2 SV5.3 TOP4.2
TOP75: R140.2 SV5.5 TOP4.3
TOP76: R167.2 SV6.33 TOP5.18
TOP77: R165.2 SV6.31 TOP5.17
TOP78: R172.2 SV6.29 TOP5.16
TOP79: R153.2 SV6.27 TOP5.15
TOP80: R168.2 SV6.25 TOP5.14
TOP81: R152.2 SV6.23 TOP5.13
TOP82: R173.2 SV6.15 TOP5.8
TOP83: R178.2 SV6.13 TOP5.7
TOP84: R164.2 SV6.11 TOP5.6
TOP85: R157.2 SV6.9 TOP5.5
TOP86: R175.2 SV6.7 TOP5.4
TOP87: R166.2 SV6.1 TOP5.1
TOP88: R160.2 SV6.21 TOP5.12
TOP89: R169.2 SV6.3 TOP5.2
TOP90: R170.2 SV6.5 TOP5.3
U1: D25.C R50.1 U$8.U2
U2: D12.C R24.1 U$2.U2
U3: U1.1 U$9.U1
U4: SV2.34 SV8.16 U$9.U2
V1: D26.C R52.1 U$8.V2
V2: D13.C R26.1 U$2.V2
V3: SV2.32 SV7.TT U$9.V2
V4: U$9.V1 V1.1
VCC: R1.2 R3.2 R5.2 R7.2 R9.2 R11.2 R13.2 R15.2 R17.2 R19.2 R21.2 R23.2 R25.2 U$2.A2
VCC1: R27.2 R29.2 R31.2 R33.2 R35.2 R37.2 R39.2 R41.2 R43.2 R45.2 R47.2 R49.2 R51.2 U$8.A2
VCC2 [supply]: EDGE2.A2 IC17.14 IC18.14 IC19.14 IC20.14 IC21.14 IC22.14 IC23.14 IC24.12 IC24.13 IC24.14
VCC4 [supply]: EDGE4.A2 IC33.14 IC34.14 IC35.14 IC36.14 IC37.14 IC38.14 IC39.14 IC40.12 IC40.13 IC40.14
VCC5 [supply]: EDGE5.A2 IC41.14 IC42.14 IC43.14 IC44.14 IC45.14 IC46.14 IC47.14 IC48.12 IC48.13 IC48.14
VCC6: A2.1 U$9.A2

## Tracks (layer width: path | path; a pad name or v marks a point on that pad's centre or on a via)
-15V
  Top 0.762: B40.4 94.61,12.7 93.34,11.43 93.34,9.53 94.61,8.26 104.14,8.26 104.14,17.14 104.78,17.78 105.41,17.78 FLEX1.2
  Bottom 0.762: B40.4 94.61,12.7 64.14,12.7 59.69,8.26 13.97,8.26 U$2.B2
-15V1
  Top 0.762: B1.4 94.61,76.2 93.34,74.93 93.34,73.03 94.61,71.75 104.14,71.75 104.14,80.64 104.78,81.28 105.41,81.28 FLEX2.2
  Bottom 0.762: B1.4 94.61,76.2 64.14,76.2 59.69,71.75 13.97,71.75 U$8.B2
-15V2  (via drill 0.61)
  Top 0.381: v207.01,55.24 213.36,55.24 214,55.88 217.81,55.88 219.07,54.61 233.68,54.61 234.31,55.24 v237.49,55.24
  Bottom 0.381: v207.01,55.24 195.58,55.24 188.59,48.26 184.78,48.26 B2.1 | v237.49,55.24 238.76,55.24 U$9.B2
A1  (via drill 0.61)
  Top 0.381: v219.71,57.15 238.76,57.15 U$9.A1
  Bottom 0.381: 188.59,46.99 187.32,46.99 178.44,38.1 174.62,38.1 173.35,39.37 167,39.37 SV1.10 | 188.59,46.99 189.87,45.72 SV9.2 | 216.53,57.15 218.44,55.24 218.44,53.98 217.81,53.34 216.53,53.34 215.26,52.07 SV7.C | 216.53,57.15 210.82,57.15 205.74,52.07 193.68,52.07 188.59,46.99 | 216.53,57.15 v219.71,57.15
B1  (via drill 0.61)
  Top 0.381: v219.71,55.88 219.07,55.88 217.17,57.78 195.58,57.78 182.25,44.45 167,44.45 SV1.6 | U$9.B1 238.76,53.98 234.31,53.98 232.41,52.07 217.81,52.07 SV7.D
  Bottom 0.381: v219.71,55.88 219.71,53.98 217.81,52.07 SV7.D
BOT31  (via drill 0.61)
  Top 0.381: v85.09,147.64 85.09,141.6 81.28,137.79 R89.2
  Bottom 0.381: BOT2.15 106.05,150.5 105.73,150.18 94.61,150.18 SV3.26 93.34,149.54 92.39,148.59 86.04,148.59 v85.09,147.64
BOT32
  Bottom 0.381: 109.22,174.94 109.22,171.77 109.22,169.86 107.95,169.86 BOT2.3 | 109.22,174.94 R68.2 | 109.22,174.94 94.61,174.94 SV3.6
BOT33
  Bottom 0.381: 92.71,173.99 88.27,173.99 87,175.26 R81.2 | 92.71,173.99 105.41,173.99 106.05,173.35 BOT2.1 | 92.71,173.99 92.71,175.9 93.34,176.53 95.25,176.53 95.25,178.75 94.3,179.71 SV3.2
BOT34
  Bottom 0.381: 83.19,176.53 81.92,177.8 R73.2 | 83.19,176.53 85.72,173.99 86.68,173.99 89.22,171.45 BOT2.2 | 83.19,176.53 92.39,176.53 93.34,177.48 SV3.4
BOT35  (via drill 0.61)
  Top 0.381: v98.42,168.59 94.61,172.4 SV3.8
  Bottom 0.381: R86.2 109.22,179.71 110.49,179.71 110.49,171.45 110.49,168.59 107.95,168.59 BOT2.4 106.05,168.59 v98.42,168.59
BOT36
  Bottom 0.381: SV3.10 94.61,169.86 97.16,167.32 105.73,167.32 106.05,167 BOT2.5 107.31,167 111.12,167 111.12,180.34 109.22,182.25 R61.2
BOT37
  Bottom 0.381: 107.31,140.97 107.31,140.34 109.22,140.34 R84.2 | 107.31,140.97 107.31,144.15 BOT2.19 | 107.31,140.97 95.57,140.97 94.61,140.02 SV3.34
BOT38
  Top 0.381: R65.2 100.97,137.16 100.97,139.38 98.42,141.92 94.61,141.92 SV3.32
  Bottom 0.381: BOT2.18 106.05,145.73 105.73,145.41 97.47,145.41 94.61,142.56 SV3.32
BOT39
  Bottom 0.381: SV3.30 94.61,145.1 96.52,147 105.73,147 106.05,147.32 BOT2.17 107.31,147.32 110.49,147.32 110.49,136.53 109.22,135.25 R66.2
BOT40
  Bottom 0.381: SV3.28 94.61,147.64 95.57,148.59 105.73,148.59 106.05,148.91 BOT2.16 107.31,148.91 111.12,148.91 111.12,134.62 109.22,132.72 R72.2
BOT41
  Bottom 0.381: BOT2.14 106.05,152.08 94.61,152.08 SV3.24 93.34,152.08 92.39,151.13 85.72,151.13 81.92,147.32 R87.2
BOT42
  Bottom 0.381: BOT2.12 94.3,155.57 SV3.22 93.34,154.62 92.39,153.67 88.27,153.67 87,154.94 R71.2
BOT43
  Bottom 0.381: 98.74,158.12 94.61,162.24 SV3.16 | 98.74,158.12 99.06,157.8 105.73,157.8 106.05,157.48 BOT2.11 | 98.74,158.12 96.84,156.21 83.19,156.21 81.92,157.48 R90.2
BOT44
  Top 0.381: R64.2 90.17,162.56 90.17,163.19 90.81,163.83 92.39,163.83 93.34,164.78 SV3.14
  Bottom 0.381: BOT2.9 106.05,160.66 105.73,160.97 100.65,160.97 96.84,164.78 94.61,164.78 SV3.14
BOT45
  Bottom 0.381: 95.57,166.37 94.61,167.32 SV3.12 | 95.57,166.37 96.2,165.74 105.73,165.74 106.05,165.42 BOT2.6 | 95.57,166.37 90.81,166.37 87,170.18 R69.2
BOT61  (via drill 0.61)
  Top 0.381: v167.64,105.09 167.64,111.12 171.45,114.94 R149.2
  Bottom 0.381: BOT4.15 146.69,102.23 147,102.55 158.12,102.55 SV5.26 159.38,103.19 160.34,104.14 166.69,104.14 v167.64,105.09
BOT62
  Bottom 0.381: 143.51,77.79 143.51,80.96 143.51,82.55 144.78,82.55 BOT4.3 | R128.2 143.51,77.79 | 143.51,77.79 158.12,77.79 SV5.6
BOT63
  Bottom 0.381: 160.02,78.74 164.47,78.74 165.74,77.47 R141.2 | 160.02,78.74 147.32,78.74 146.69,79.38 BOT4.1 | 160.02,78.74 160.02,76.83 159.38,76.2 157.48,76.2 157.48,73.98 158.43,73.03 SV5.2
BOT64
  Bottom 0.381: 169.54,76.2 170.81,74.93 R133.2 | 169.54,76.2 167,78.74 166.05,78.74 163.51,81.28 BOT4.2 | 169.54,76.2 160.34,76.2 159.38,75.25 SV5.4
BOT65  (via drill 0.61)
  Top 0.381: v154.31,84.14 158.12,80.33 SV5.8
  Bottom 0.381: R146.2 143.51,73.03 142.24,73.03 142.24,81.28 142.24,84.14 144.78,84.14 BOT4.4 146.69,84.14 v154.31,84.14
BOT66
  Bottom 0.381: SV5.10 158.12,82.87 155.57,85.41 147,85.41 146.69,85.72 BOT4.5 145.41,85.72 141.6,85.72 141.6,72.39 143.51,70.48 R121.2
BOT67
  Bottom 0.381: 145.41,111.76 145.41,112.39 143.51,112.39 R144.2 | 145.41,111.76 145.41,108.58 BOT4.19 | 145.41,111.76 157.16,111.76 158.12,112.71 SV5.34
BOT68
  Top 0.381: R125.2 151.76,115.57 151.76,113.35 154.31,110.81 158.12,110.81 SV5.32
  Bottom 0.381: BOT4.18 146.69,107 147,107.31 155.26,107.31 158.12,110.17 SV5.32
BOT69
  Bottom 0.381: SV5.30 158.12,107.63 156.21,105.73 147,105.73 146.69,105.41 BOT4.17 145.41,105.41 142.24,105.41 142.24,116.2 143.51,117.47 R126.2
BOT70
  Bottom 0.381: SV5.28 158.12,105.09 157.16,104.14 147,104.14 146.69,103.82 BOT4.16 145.41,103.82 141.6,103.82 141.6,118.11 143.51,120.02 R132.2
BOT71
  Bottom 0.381: BOT4.14 146.69,100.65 158.12,100.65 SV5.24 159.38,100.65 160.34,101.6 167,101.6 170.81,105.41 R147.2
BOT72
  Bottom 0.381: BOT4.12 158.43,97.16 SV5.22 159.38,98.11 160.34,99.06 164.47,99.06 165.74,97.79 R131.2
BOT73
  Bottom 0.381: 153.99,94.61 158.12,90.49 SV5.16 | 153.99,94.61 153.67,94.93 147,94.93 146.69,95.25 BOT4.11 | 153.99,94.61 155.89,96.52 169.54,96.52 170.81,95.25 R150.2
BOT74
  Top 0.381: R124.2 162.56,90.17 162.56,89.53 161.93,88.9 160.34,88.9 159.38,87.95 SV5.14
  Bottom 0.381: BOT4.9 146.69,92.08 147,91.76 152.08,91.76 155.89,87.95 158.12,87.95 SV5.14
BOT75
  Bottom 0.381: 157.16,86.36 158.12,85.41 SV5.12 | 157.16,86.36 156.53,87 147,87 146.69,87.31 BOT4.6 | 157.16,86.36 161.93,86.36 165.74,82.55 R129.2
BOT76  (via drill 0.61)
  Top 0.381: v167.64,168.59 167.64,174.62 171.45,178.44 R179.2
  Bottom 0.381: BOT5.15 146.69,165.74 147,166.05 158.12,166.05 SV6.26 159.38,166.69 160.34,167.64 166.69,167.64 v167.64,168.59
BOT77
  Bottom 0.381: 143.51,141.29 143.51,144.46 143.51,146.05 144.78,146.05 BOT5.3 | R158.2 143.51,141.29 | 143.51,141.29 158.12,141.29 SV6.6
BOT78
  Bottom 0.381: 160.02,142.24 164.47,142.24 165.74,140.97 R171.2 | 160.02,142.24 147.32,142.24 146.69,142.88 BOT5.1 | 160.02,142.24 160.02,140.34 159.38,139.7 157.48,139.7 157.48,137.48 158.43,136.53 SV6.2
BOT79
  Bottom 0.381: 169.54,139.7 170.81,138.43 R163.2 | 169.54,139.7 167,142.24 166.05,142.24 163.51,144.78 BOT5.2 | 169.54,139.7 160.34,139.7 159.38,138.75 SV6.4
BOT80  (via drill 0.61)
  Top 0.381: v154.31,147.64 158.12,143.83 SV6.8
  Bottom 0.381: R176.2 143.51,136.53 142.24,136.53 142.24,144.78 142.24,147.64 144.78,147.64 BOT5.4 146.69,147.64 v154.31,147.64
BOT81
  Bottom 0.381: SV6.10 158.12,146.37 155.57,148.91 147,148.91 146.69,149.22 BOT5.5 145.41,149.22 141.6,149.22 141.6,135.89 143.51,133.99 R151.2
BOT82
  Bottom 0.381: 145.41,175.26 145.41,175.9 143.51,175.9 R174.2 | 145.41,175.26 145.41,172.09 BOT5.19 | 145.41,175.26 157.16,175.26 158.12,176.21 SV6.34
BOT83
  Top 0.381: R155.2 151.76,179.07 151.76,176.85 154.31,174.31 158.12,174.31 SV6.32
  Bottom 0.381: BOT5.18 146.69,170.5 147,170.81 155.26,170.81 158.12,173.67 SV6.32
BOT84
  Bottom 0.381: SV6.30 158.12,171.13 156.21,169.23 147,169.23 146.69,168.91 BOT5.17 145.41,168.91 142.24,168.91 142.24,179.71 143.51,180.97 R156.2
BOT85
  Bottom 0.381: SV6.28 158.12,168.59 157.16,167.64 147,167.64 146.69,167.32 BOT5.16 145.41,167.32 141.6,167.32 141.6,181.61 143.51,183.51 R162.2
BOT86
  Bottom 0.381: BOT5.14 146.69,164.15 158.12,164.15 SV6.24 159.38,164.15 160.34,165.1 167,165.1 170.81,168.91 R177.2
BOT87
  Bottom 0.381: BOT5.12 158.43,160.66 SV6.22 159.38,161.61 160.34,162.56 164.47,162.56 165.74,161.29 R161.2
BOT88
  Bottom 0.381: 153.99,158.12 158.12,153.99 SV6.16 | 153.99,158.12 153.67,158.43 147,158.43 146.69,158.75 BOT5.11 | 153.99,158.12 155.89,160.02 169.54,160.02 170.81,158.75 R180.2
BOT89
  Top 0.381: R154.2 162.56,153.67 162.56,153.03 161.93,152.4 160.34,152.4 159.38,151.45 SV6.14
  Bottom 0.381: BOT5.9 146.69,155.57 147,155.26 152.08,155.26 155.89,151.45 158.12,151.45 SV6.14
BOT90
  Bottom 0.381: 157.16,149.86 158.12,148.91 SV6.12 | 157.16,149.86 156.53,150.5 147,150.5 146.69,150.81 BOT5.6 | 157.16,149.86 161.93,149.86 165.74,146.05 R159.2
C1
  Top 0.381: SV1.33 163.83,9.53 163.83,10.79 SV1.31 163.83,12.06 163.83,13.34 SV1.29 163.83,14.61 163.83,15.88 SV1.27 163.83,17.14 163.83,18.41 SV1.25 163.83,19.68 163.83,20.95 SV1.23 163.83,22.23 163.83,23.5 SV1.21 163.83,24.77 163.83,26.04 SV1.19 163.83,27.3 163.83,28.57 SV1.17 163.83,29.84 163.83,31.11 SV1.15 163.83,32.38 163.83,33.66 SV1.13 163.83,34.92 163.83,36.2 SV1.11 163.83,37.47 163.83,38.73 SV1.9 163.83,40.01 163.83,41.27 SV1.7 163.83,42.55 163.83,43.81 SV1.5 163.83,45.09 163.83,46.35 SV1.3 163.83,47.62 163.83,48.9 SV1.1 | 214.63,38.1 214.63,38.73 SV7.P | 214.63,38.1 214.63,37.47 SV7.S | C1.1 186.06,27.94 187.32,27.94 SV9.15 187.96,28.57 187.96,29.84 SV9.13 187.96,31.11 187.96,32.38 SV9.11 187.96,33.66 187.96,34.92 SV9.9 187.96,36.2 187.96,37.47 SV9.7 187.96,38.73 187.96,40.01 SV9.5 187.96,41.27 187.96,42.55 SV9.3 187.96,43.81 187.96,45.09 SV9.1 | 214.63,38.1 217.81,38.1 230.5,50.8 238.76,50.8 U$9.C1
  Bottom 0.381: SV7.S 214,36.83 189.87,36.83 188.59,35.56 SV9.9 | SV1.15 164.47,31.75 165.74,30.48 177.16,30.48 187.32,40.64 SV9.5
  pour Top (isolate 0.254): 127.64,0 238.12,0 238.12,61.59 127.64,61.59
C2  (via drill 0.61)
  Top 0.381: SV8.15 187.96,8.26 187.96,9.53 SV8.13 187.96,10.79 187.96,12.06 SV8.11 187.96,13.34 187.96,14.61 SV8.9 187.96,15.88 187.96,17.14 SV8.7 | C2.1 186.06,25.4 187.32,25.4 SV8.1 187.96,24.77 187.96,23.5 SV8.3 187.96,22.23 187.96,20.95 SV8.5 188.59,20.32 189.87,19.05 200.66,19.05 | SV2.33 200.66,10.79 200.66,12.06 SV2.31 200.66,13.34 200.66,14.61 SV2.29 200.66,15.88 200.66,17.14 SV2.27 200.66,18.41 200.66,19.05 | 200.66,19.05 200.66,19.68 SV2.25 200.66,20.95 200.66,22.23 SV2.23 200.66,23.5 200.66,24.77 SV2.21 200.66,26.04 200.66,27.3 SV2.19 200.66,28.57 200.66,29.84 SV2.17 200.66,31.11 200.66,32.38 SV2.15 200.66,33.66 200.66,34.92 SV2.13 200.66,36.2 200.66,37.47 SV2.11 | SV2.9 200.66,41.27 200.66,42.55 SV2.7 200.66,43.81 200.66,45.09 SV2.5 200.66,46.35 200.66,47.62 SV2.3 | SV2.1 200.66,50.16 200.66,48.9 SV2.3 | v212.72,49.53 202.56,49.53 201.29,48.26 SV2.3
  Bottom 0.381: SV8.5 187.96,19.68 187.96,18.41 SV8.7 | SV2.9 200.66,40.01 200.66,38.73 SV2.11 | v212.72,49.53 214,48.26 215.26,48.26 215.9,48.9 215.9,50.16 216.53,50.8 238.76,50.8 U$9.C2
  pour Bottom (isolate 0.254): 127.64,0 238.12,0 238.12,61.59 127.64,61.59
  pour Top (isolate 0.254): 127.64,0 238.12,0 238.12,61.59 127.64,61.59
D1
  Top 0.381: D14.C 38.1,73.66 40.01,73.66 R28.1
  Bottom 0.381: D14.C 35.56,73.66 33.02,76.2 13.97,76.2 U$8.D2
D2
  Top 0.381: D1.C 38.1,10.16 40.01,10.16 R2.1
  Bottom 0.381: D1.C 35.56,10.16 33.02,12.7 13.97,12.7 U$2.D2
D3
  Top 0.381: SV2.6 203.84,45.72 211.46,45.72 214,48.26 215.26,48.26 216.53,49.53 SV7.F
  Bottom 0.381: SV7.F 217.81,49.53 238.76,49.53 U$9.D2
D4  (via drill 0.61)
  Top 0.381: SV1.8 167,41.91 180.97,41.91 192.41,53.34 205.74,53.34 208.28,50.8 217.81,50.8 218.44,50.16 218.44,48.9 217.17,47.62 SV7.J | v229.87,48.26 238.76,48.26 U$9.D1
  Bottom 0.381: v229.87,48.26 219.07,48.26 217.81,46.99 SV7.J
E1
  Top 0.381: D15.C 38.1,77.47 40.01,77.47 R30.1
  Bottom 0.381: D15.C 35.56,77.47 33.66,79.38 13.97,79.38 U$8.E2
E2
  Top 0.381: D2.C 38.1,13.97 40.01,13.97 R4.1
  Bottom 0.381: D2.C 35.56,13.97 33.66,15.88 13.97,15.88 U$2.E2
E3  (via drill 0.61)
  Top 0.381: v210.82,43.18 215.26,43.18 216.53,44.45 SV7.L 217.81,44.45 v220.34,46.99
  Bottom 0.381: v210.82,43.18 203.84,43.18 SV2.8 | v220.34,46.99 238.12,46.99 238.76,46.35 U$9.E2
E4  (via drill 0.61)
  Top 0.381: v193.04,46.99 187.32,46.99 180.97,40.64 177.16,40.64 173.35,36.83 167,36.83 SV1.12 | v226.06,44.45 238.76,44.45 U$9.E1
  Bottom 0.381: v193.04,46.99 210.19,46.99 214,43.18 215.26,43.18 216.53,41.91 SV7.N 217.81,41.91 220.34,44.45 v226.06,44.45
F1
  Top 0.381: D16.C 38.1,81.28 40.01,81.28 R32.1
  Bottom 0.381: D16.C 35.56,81.28 34.29,82.55 13.97,82.55 U$8.F2
F2
  Top 0.381: D3.C 38.1,17.78 40.01,17.78 R6.1
  Bottom 0.381: D3.C 35.56,17.78 34.29,19.05 13.97,19.05 U$2.F2
F3
  Top 0.381: SV7.H 214.63,46.35 214.63,45.09 SV7.K 214,44.45 207.65,44.45 203.84,40.64 SV2.10 202.56,40.64 201.29,39.37 200.03,39.37 199.39,38.73 199.39,29.84 190.5,20.95 SV8.6
  Bottom 0.381: U$9.F2 238.76,43.18 229.24,43.18 226.69,45.72 216.53,45.72 215.26,46.99 SV7.H
F4  (via drill 0.61)
  Top 0.381: U$9.F1 238.76,42.55 231.78,35.56 216.53,35.56 215.26,34.29 SV7.U 214,34.29 210.82,37.47 210.82,38.1 v209.55,39.37
  Bottom 0.381: SV1.14 167,34.29 179.71,34.29 187.32,41.91 188.59,41.91 189.87,43.18 SV9.4 191.13,43.18 198.75,43.18 200.03,41.91 207.01,41.91 v209.55,39.37
GND
  Top 0.762: D13.A 26.04,55.24 26.04,52.7 D12.A 26.04,51.44 26.04,48.9 D11.A 26.04,47.62 26.04,45.09 D10.A 26.04,43.81 26.04,41.27 D9.A 26.04,40.01 26.04,37.47 D8.A 26.04,36.2 26.04,33.66 D7.A 26.04,32.38 26.04,29.84 D6.A 26.04,28.57 26.04,26.04 D5.A 26.04,24.77 26.04,22.23 D4.A 26.04,20.95 26.04,18.41 D3.A 26.04,17.14 26.04,14.61 D2.A 26.04,13.34 26.04,10.79 D1.A 27.3,9.53 27.3,6.99 104.78,6.99 109.22,11.43 109.22,18.73 107.95,19.37 FLEX1.3
  Bottom 0.762: B40.1 97.79,10.79 97.79,12.06 B40.3 97.79,13.34 97.79,13.97 97.79,14.61 B40.5 97.79,15.88 97.79,17.14 B40.7 97.79,18.41 97.79,19.68 B40.9 97.79,20.95 97.79,22.23 B40.11 97.79,23.5 97.79,24.77 B40.13 97.79,26.04 97.79,27.3 B40.15 97.79,28.57 97.79,29.84 B40.17 97.79,31.11 97.79,32.38 B40.19 97.79,33.66 97.79,34.92 B40.21 97.79,36.2 97.79,37.47 B40.23 97.79,38.73 97.79,40.01 B40.25 97.79,41.27 97.79,42.55 B40.27 97.79,43.81 97.79,45.09 B40.29 97.79,46.35 97.79,47.62 B40.31 97.79,48.9 97.79,50.16 B40.33 97.79,51.44 90.81,58.42 30.48,58.42 27.94,55.88 D13.A | U$2.C2 13.97,10.16 25.4,10.16 D1.A
GND1
  Top 0.762: D26.A 26.04,118.75 26.04,116.2 D25.A 26.04,114.94 26.04,112.39 D24.A 26.04,111.12 26.04,108.58 D23.A 26.04,107.31 26.04,104.78 D22.A 26.04,103.5 26.04,100.97 D21.A 26.04,99.69 26.04,97.16 D20.A 26.04,95.89 26.04,93.34 D19.A 26.04,92.08 26.04,89.53 D18.A 26.04,88.27 26.04,85.72 D17.A 26.04,84.45 26.04,81.92 D16.A 26.04,80.64 26.04,78.11 D15.A 26.04,76.83 26.04,74.3 D14.A 27.3,73.03 27.3,70.48 104.78,70.48 109.22,74.93 109.22,82.23 107.95,82.87 FLEX2.3
  Bottom 0.762: B1.1 97.79,74.3 97.79,75.56 B1.3 97.79,76.83 97.79,77.47 97.79,78.11 B1.5 97.79,79.38 97.79,80.64 B1.7 97.79,81.92 97.79,83.19 B1.9 97.79,84.45 97.79,85.72 B1.11 97.79,87 97.79,88.27 B1.13 97.79,89.53 97.79,90.81 B1.15 97.79,92.08 97.79,93.34 B1.17 97.79,94.61 97.79,95.89 B1.19 97.79,97.16 97.79,98.42 B1.21 97.79,99.69 97.79,100.97 B1.23 97.79,102.23 97.79,103.5 B1.25 97.79,104.78 97.79,106.05 B1.27 97.79,107.31 97.79,108.58 B1.29 97.79,109.86 97.79,111.12 B1.31 97.79,112.39 97.79,113.67 B1.33 97.79,114.94 90.81,121.92 30.48,121.92 27.94,119.38 D26.A | U$8.C2 13.97,73.66 25.4,73.66 D14.A
GND2  (via drill 0.61)
  Top 0.762: IC23.5 31.11,181.93 32.38,181.93 IC23.4 | IC23.7 25.08,181.61 23.81,180.34 23.81,172.72 25.08,171.45 IC21.7 25.08,168.91 23.81,167.64 23.81,152.72 23.97,152.56 | 23.97,152.56 23.81,152.4 23.81,142.24 25.08,140.97 IC17.7 | 23.97,152.56 25.08,153.67 IC19.7 | v15.24,180.02 15.24,179.71 13.97,179.71 EDGE2.T1 | v97.47,154.62 96.2,155.89 v96.2,157.16 | SV3.17 91.12,159.38 91.12,158.12 SV3.19 92.08,157.16 93.34,157.16 SV3.20 93.66,158.12 93.66,159.38 SV3.18 | IC24.7 47.94,181.61 46.67,180.34 46.67,172.72 47.94,171.45 IC22.7 47.94,168.91 46.04,167 46.04,152.4 | 46.04,152.4 46.04,142.88 47.94,140.97 IC18.7 | 46.04,152.4 47.62,153.99 IC20.7 48.9,155.89 v52.39,159.38
  Bottom 0.762: IC23.5 29.84,181.93 28.57,180.66 27.3,180.66 26.04,181.93 IC23.7 24.77,181.93 17.14,181.93 v15.24,180.02 | IC17.7 24.77,138.75 24.45,138.43 13.97,138.43 EDGE2.C2 | v97.47,154.62 97.79,154.31 106.05,154.31 BOT2.13 | v96.2,157.16 94.61,157.16 SV3.20 | v52.39,159.38 69.85,159.38 72.07,161.61 79.06,161.61 82.23,158.43 90.17,158.43 90.81,157.8 SV3.19 | IC23.4 33.66,181.93 34.92,180.66 46.35,180.66 47.62,181.93 IC24.7
GND4  (via drill 0.61)
  Top 0.762: IC39.5 221.62,70.8 220.34,70.8 IC39.4 | IC39.7 227.65,71.12 228.92,72.39 228.92,80.01 227.65,81.28 IC37.7 227.65,83.82 228.92,85.09 228.92,100.01 228.76,100.17 | 228.76,100.17 228.92,100.33 228.92,110.49 227.65,111.76 IC33.7 | 228.76,100.17 227.65,99.06 IC35.7 | v237.49,72.71 237.49,73.03 238.76,73.03 EDGE4.T1 | v155.26,98.11 156.53,96.84 v156.53,95.57 | SV5.17 161.61,93.34 161.61,94.61 SV5.19 160.66,95.57 159.38,95.57 SV5.20 159.07,94.61 159.07,93.34 SV5.18 | IC40.7 204.79,71.12 206.06,72.39 206.06,80.01 204.79,81.28 IC38.7 204.79,83.82 206.69,85.72 206.69,100.33 | 206.69,100.33 206.69,109.86 204.79,111.76 IC34.7 | 206.69,100.33 205.1,98.74 IC36.7 203.84,96.84 v200.34,93.34
  Bottom 0.762: IC39.5 222.88,70.8 224.16,72.07 225.43,72.07 226.69,70.8 IC39.7 227.97,70.8 235.59,70.8 v237.49,72.71 | IC33.7 227.97,113.98 228.28,114.3 238.76,114.3 EDGE4.C2 | v155.26,98.11 154.94,98.42 146.69,98.42 BOT4.13 | v156.53,95.57 158.12,95.57 SV5.20 | v200.34,93.34 182.88,93.34 180.66,91.12 173.67,91.12 170.5,94.3 162.56,94.3 161.93,94.93 SV5.19 | IC39.4 219.07,70.8 217.81,72.07 206.38,72.07 205.1,70.8 IC40.7
GND5  (via drill 0.61)
  Top 0.762: IC47.5 221.62,134.3 220.34,134.3 IC47.4 | IC47.7 227.65,134.62 228.92,135.89 228.92,143.51 227.65,144.78 IC45.7 227.65,147.32 228.92,148.59 228.92,163.51 228.76,163.67 | 228.76,163.67 228.92,163.83 228.92,173.99 227.65,175.26 IC41.7 | 228.76,163.67 227.65,162.56 IC43.7 | v237.49,136.21 237.49,136.53 238.76,136.53 EDGE5.T1 | v155.26,161.61 156.53,160.34 v156.53,159.07 | SV6.17 161.61,156.84 161.61,158.12 SV6.19 160.66,159.07 159.38,159.07 SV6.20 159.07,158.12 159.07,156.84 SV6.18 | IC48.7 204.79,134.62 206.06,135.89 206.06,143.51 204.79,144.78 IC46.7 204.79,147.32 206.69,149.22 206.69,163.83 | 206.69,163.83 206.69,173.35 204.79,175.26 IC42.7 | 206.69,163.83 205.1,162.24 IC44.7 203.84,160.34 v200.34,156.84
  Bottom 0.762: IC47.5 222.88,134.3 224.16,135.57 225.43,135.57 226.69,134.3 IC47.7 227.97,134.3 235.59,134.3 v237.49,136.21 | IC41.7 227.97,177.48 228.28,177.8 238.76,177.8 EDGE5.C2 | v155.26,161.61 154.94,161.93 146.69,161.93 BOT5.13 | v156.53,159.07 158.12,159.07 SV6.20 | v200.34,156.84 182.88,156.84 180.66,154.62 173.67,154.62 170.5,157.8 162.56,157.8 161.93,158.43 SV6.19 | IC47.4 219.07,134.3 217.81,135.57 206.38,135.57 205.1,134.3 IC48.7
H1
  Top 0.381: D17.C 38.1,85.09 40.01,85.09 R34.1
  Bottom 0.381: D17.C 35.56,85.09 34.29,86.36 13.97,86.36 U$8.H2
H2
  Top 0.381: D4.C 38.1,21.59 40.01,21.59 R8.1
  Bottom 0.381: D4.C 35.56,21.59 34.29,22.86 13.97,22.86 U$2.H2
H3
  Bottom 0.381: SV2.12 203.84,38.1 215.26,38.1 216.53,39.37 SV7.R 217.81,39.37 238.76,39.37 U$9.H2
H4  (via drill 0.61)
  Top 0.381: v212.09,39.37 212.09,37.47 214,35.56 215.26,35.56 216.53,36.83 SV7.T 217.81,36.83 v231.14,36.83 | v233.68,35.56 236.22,38.1 238.76,38.1 U$9.H1
  Bottom 0.381: v212.09,39.37 212.09,43.81 211.46,44.45 187.32,44.45 178.44,35.56 165.74,35.56 165.1,34.92 165.1,33.66 166.37,32.38 SV1.16 | v233.68,35.56 232.41,35.56 v231.14,36.83
J1
  Top 0.381: D18.C 38.1,88.9 40.01,88.9 R36.1
  Bottom 0.381: D18.C 35.56,88.9 34.29,90.17 13.97,90.17 U$8.J2
J2
  Top 0.381: D5.C 38.1,25.4 40.01,25.4 R10.1
  Bottom 0.381: D5.C 35.56,25.4 34.29,26.67 13.97,26.67 U$2.J2
J3  (via drill 0.61)
  Top 0.381: v208.91,15.24 214,20.32 v219.71,20.32 | v219.71,26.67 219.71,27.94 v222.25,30.48 | U$9.J1 238.76,34.92 234.95,34.92 233.04,33.02 219.07,33.02 217.81,31.75 SV7.X
  Bottom 0.381: v208.91,15.24 208.91,10.79 201.93,3.81 188.59,3.81 174.62,17.78 165.74,17.78 165.1,18.41 165.1,24.77 166.37,26.04 SV1.20 | v219.71,26.67 v219.71,20.32 | v222.25,30.48 219.07,30.48 217.81,31.75 SV7.X
J4
  Top 0.381: SV7.M 214,41.91 210.19,41.91 203.84,35.56 SV2.14
  Bottom 0.381: SV8.8 191.13,17.78 196.85,23.5 196.85,31.11 200.03,34.29 201.29,34.29 202.56,35.56 SV2.14 203.84,35.56 217.81,35.56 220.34,38.1 231.78,38.1 233.04,36.83 238.76,36.83 U$9.J2
JA2
  Top 0.381: SV8.2 191.13,25.4 193.68,25.4 196.85,28.57 196.85,47.62 194.31,50.16 PAD1.1 194.94,50.8 196.22,52.07 201.29,52.07 202.56,50.8 SV2.2
  Bottom 0.381: SV7.B 216.53,54.61 215.26,55.88 210.82,55.88 205.74,50.8 203.84,50.8 SV2.2
JB2
  Top 0.381: SV8.4 190.5,23.5 189.23,24.77 189.23,26.04 189.87,26.67 193.68,26.67 195.58,28.57 195.58,46.35 194.31,47.62 PAD2.1
  Bottom 0.381: SV7.A 214,54.61 207.65,48.26 203.84,48.26 SV2.4 202.56,48.26 201.29,49.53 196.22,49.53 194.94,48.26 PAD2.1
JU1  (via drill 0.61)
  Top 0.381: v185.42,31.75 v177.8,39.37 | v189.23,6.35 214,6.35 SV7.UU
  Bottom 0.381: v177.8,39.37 174.62,39.37 167,46.99 SV1.4 165.74,46.99 164.47,48.26 158.12,48.26 PAD3.1 | SV9.14 189.87,30.48 188.59,31.75 v185.42,31.75 182.88,29.21 182.88,13.34 187.32,8.89 188.59,8.89 189.23,8.26 v189.23,6.35
JV1  (via drill 0.61)
  Top 0.381: PAD4.1 155.57,48.26 158.12,50.8 164.47,50.8 165.74,49.53 SV1.2 166.37,48.9 165.1,47.62 165.1,26.04 165.74,25.4 v179.07,25.4 | v189.23,13.97 194.94,13.97 200.03,8.89 201.29,8.89 201.93,9.53 201.93,10.79 202.56,11.43 204.47,11.43 207.01,8.89 212.72,8.89 214,7.62 215.26,7.62 216.53,6.35 SV7.VV | v181.61,22.86 185.42,22.86 v186.69,21.59
  Bottom 0.381: 189.23,21.59 v189.23,13.97 | 189.23,21.59 189.23,26.04 190.5,27.3 SV9.16 | v179.07,25.4 v181.61,22.86 | v186.69,21.59 189.23,21.59
K1
  Top 0.381: D19.C 38.1,92.71 40.01,92.71 R38.1
  Bottom 0.381: D19.C 35.56,92.71 34.29,93.98 13.97,93.98 U$8.K2
K2
  Top 0.381: D6.C 38.1,29.21 40.01,29.21 R12.1
  Bottom 0.381: D6.C 35.56,29.21 34.29,30.48 13.97,30.48 U$2.K2
K3
  Top 0.381: SV2.16 203.84,33.02 215.26,33.02 216.53,34.29 SV7.V
  Bottom 0.381: SV7.V 217.81,34.29 238.12,34.29 238.76,33.66 U$9.K2
K4  (via drill 0.61)
  Top 0.381: SV7.AA 214.63,27.3 214.63,28.57 SV7.Y 215.26,29.21 216.53,30.48 220.34,30.48 221.62,31.75 238.76,31.75 U$9.K1 | v198.12,30.48 v198.12,40.64
  Bottom 0.381: SV1.18 167,29.21 177.16,29.21 187.32,39.37 188.59,39.37 189.87,40.64 SV9.6 191.13,40.64 v198.12,40.64 | v198.12,30.48 199.39,31.75 203.84,31.75 204.47,31.11 204.47,29.84 203.84,29.21 202.56,29.21 201.93,28.57 201.93,27.3 202.56,26.67 214,26.67 SV7.AA
L1
  Top 0.381: D20.C 38.1,96.52 40.01,96.52 R40.1
  Bottom 0.381: D20.C 35.56,96.52 34.29,95.25 13.97,95.25 U$8.L2
L2
  Top 0.381: D7.C 38.1,33.02 40.01,33.02 R14.1
  Bottom 0.381: D7.C 35.56,33.02 34.29,31.75 13.97,31.75 U$2.L2
L3  (via drill 0.61)
  Top 0.381: v175.9,20.32 174.62,21.59 167,21.59 SV1.24 | v207.65,15.24 203.84,19.05 202.56,19.05 201.93,19.68 201.93,23.5 202.56,24.13 206.38,24.13 v210.19,27.94 | v221.62,27.94 222.25,28.57 238.76,28.57 U$9.L1
  Bottom 0.381: v175.9,20.32 175.9,17.78 188.59,5.08 201.93,5.08 207.65,10.79 v207.65,15.24 | 215.26,27.94 v210.19,27.94 | 215.26,27.94 216.53,26.67 SV7.BB | v221.62,27.94 215.26,27.94
L4
  Top 0.381: SV7.W 214,31.75 205.1,31.75 203.84,30.48 SV2.18
  Bottom 0.381: SV8.10 190.5,15.88 199.39,24.77 199.39,28.57 200.03,29.21 201.29,29.21 202.56,30.48 SV2.18 | U$9.L2 238.76,30.48 224.16,30.48 221.62,33.02 216.53,33.02 215.26,31.75 SV7.W
M1
  Top 0.381: D21.C 38.1,100.33 40.01,100.33 R42.1
  Bottom 0.381: D21.C 35.56,100.33 34.29,99.06 13.97,99.06 U$8.M2
M2
  Top 0.381: D8.C 38.1,36.83 40.01,36.83 R16.1
  Bottom 0.381: D8.C 35.56,36.83 34.29,35.56 13.97,35.56 U$2.M2
M3
  Bottom 0.381: SV2.20 203.84,27.94 208.28,27.94 210.82,30.48 215.26,30.48 216.53,29.21 SV7.Z 217.81,29.21 236.22,29.21 238.76,26.67 U$9.M2
M4  (via drill 0.61)
  Top 0.381: v199.39,16.51 189.87,16.51 189.23,17.14 189.23,18.41 188.59,19.05 187.32,19.05 186.06,20.32 182.25,20.32 179.71,22.86 165.74,22.86 165.1,22.23 165.1,18.41 166.37,17.14 SV1.28 | v224.79,25.4 238.76,25.4 U$9.M1 | v220.98,21.59 217.81,21.59 SV7.FF
  Bottom 0.381: v199.39,16.51 201.29,16.51 201.93,17.14 201.93,18.41 202.56,19.05 208.91,19.05 212.72,22.86 215.26,22.86 216.53,21.59 SV7.FF | v224.79,25.4 v220.98,21.59
N1  (via drill 0.61)
  Top 0.381: 189.23,29.21 189.23,36.2 190.5,37.47 SV9.8 | 189.23,29.21 189.23,27.3 188.59,26.67 184.78,26.67 182.25,24.13 167,24.13 SV1.22 | SV7.CC 215.26,24.13 216.53,22.86 238.76,22.86 U$9.N1 | v193.04,29.21 189.23,29.21 | v199.39,21.59 v193.04,21.59
  Bottom 0.381: v193.04,21.59 v193.04,29.21 | v199.39,21.59 210.19,21.59 212.72,24.13 214,24.13 SV7.CC
N2  (via drill 0.61)